# Altium PCB LED_Matrix.PcbDoc (part 2 of 2)
Units mm, origin at the board's own origin, x right, y up, seen from the top; angles counter-clockwise.
Board outline 50 x 80 mm, 2 copper layers (Top Layer, Bottom Layer); 384 components, 49 nets, 1536 pads, 0 vias.
Unrouted connection lines stored in the file: 1487.
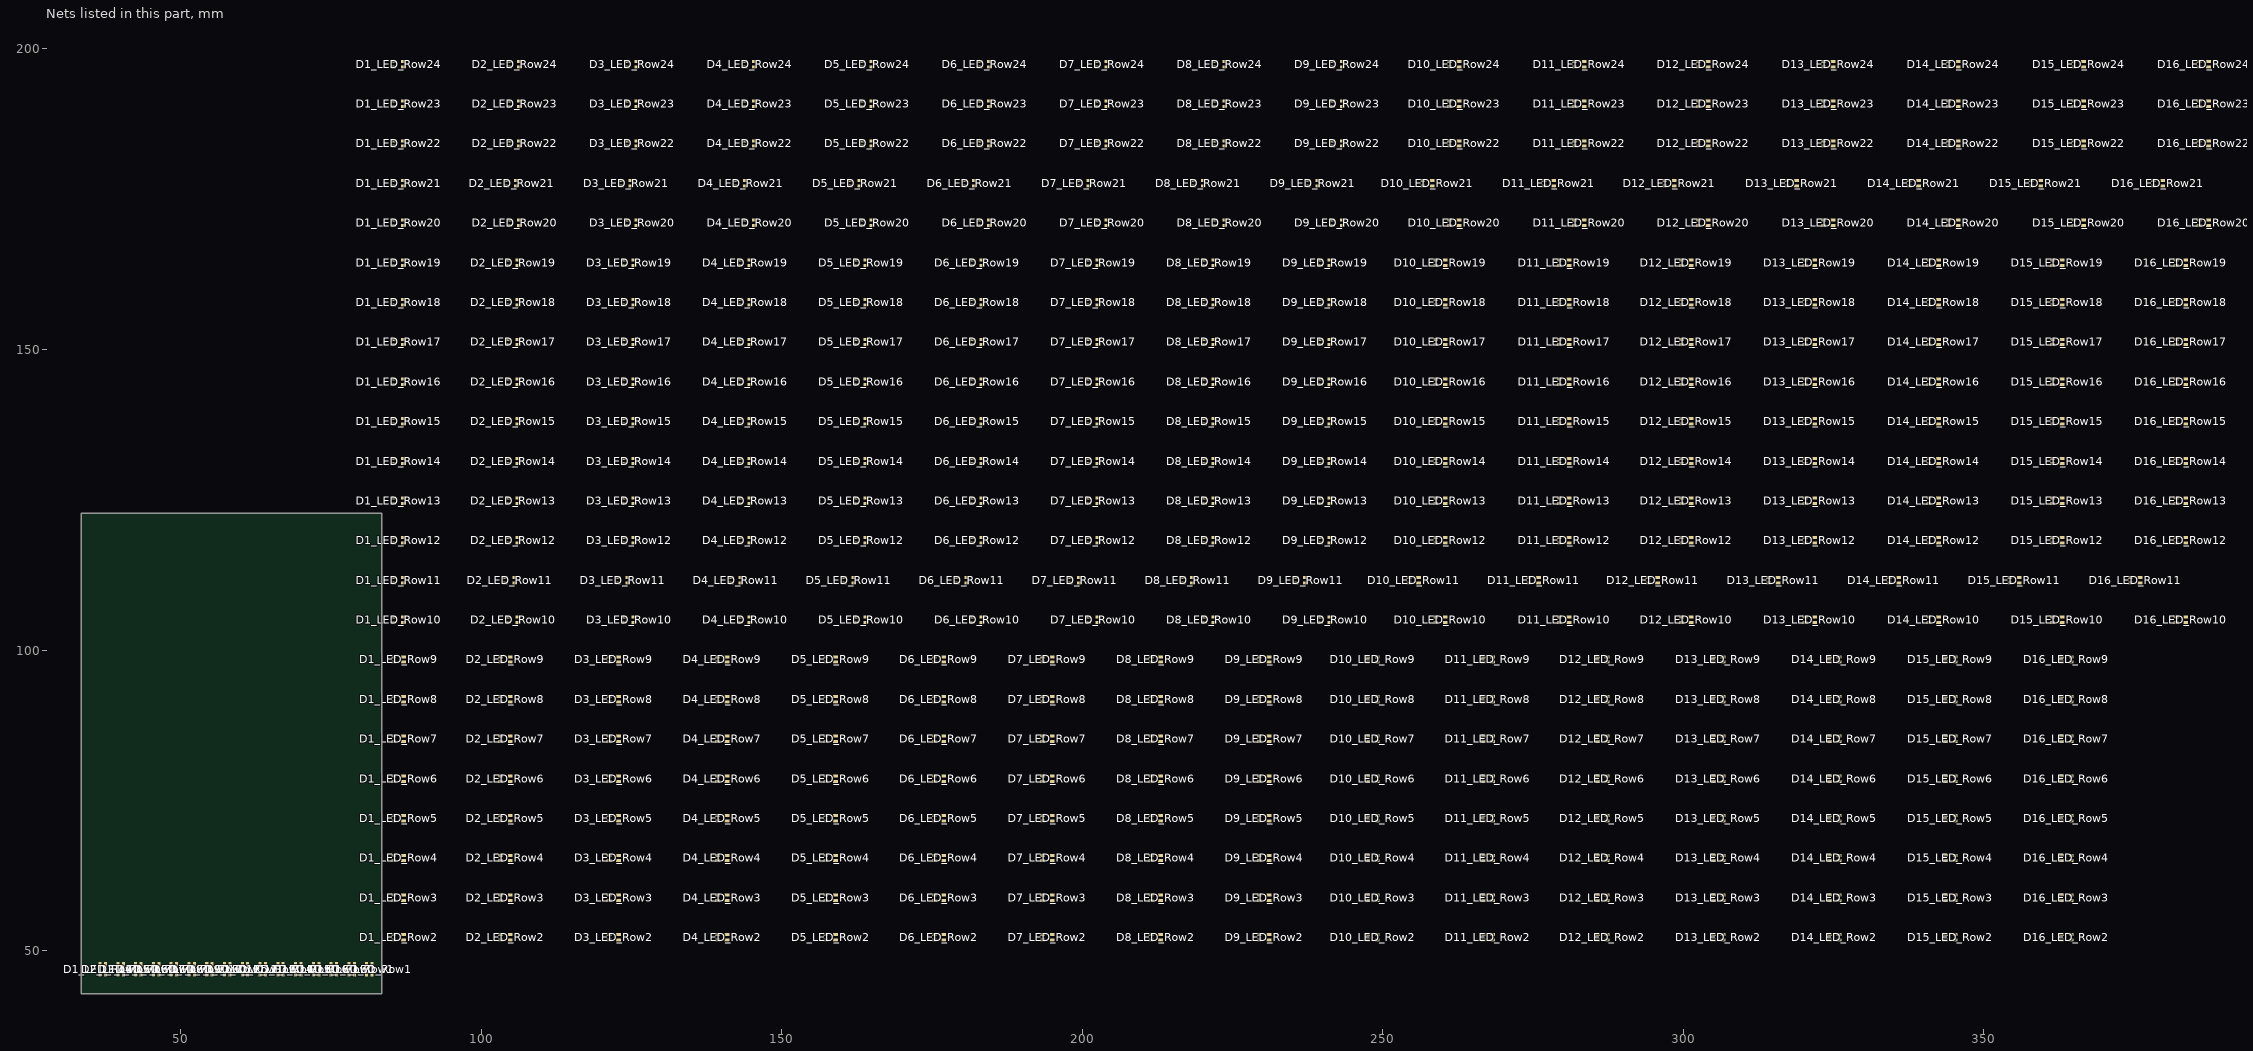
[diagram p2: the nets of this part, all layers, seen from the top]

## Part data
D1_LED_Row1 D1_LED_Row2 D1_LED_Row3 D1_LED_Row4 D1_LED_Row5 D1_LED_Row6 D1_LED_Row7 D1_LED_Row8 D1_LED_Row9 D1_LED_Row10 D1_LED_Row11 D1_LED_Row12 D1_LED_Row13 D1_LED_Row14 D1_LED_Row15 D1_LED_Row16 D1_LED_Row17 D1_LED_Row18 D1_LED_Row19 D1_LED_Row20 D1_LED_Row21 D1_LED_Row22 D1_LED_Row23 D1_LED_Row24 D2_LED_Row1 D2_LED_Row2 D2_LED_Row3 D2_LED_Row4 D2_LED_Row5 D2_LED_Row6 D2_LED_Row7 D2_LED_Row8 D2_LED_Row9 D2_LED_Row10 D2_LED_Row11 D2_LED_Row12 D2_LED_Row13 D2_LED_Row14 D2_LED_Row15 D2_LED_Row16 D2_LED_Row17 D2_LED_Row18 D2_LED_Row19 D2_LED_Row20 D2_LED_Row21 D2_LED_Row22 D2_LED_Row23 D2_LED_Row24 D3_LED_Row1 D3_LED_Row2 D3_LED_Row3 D3_LED_Row4 D3_LED_Row5 D3_LED_Row6 D3_LED_Row7 D3_LED_Row8 D3_LED_Row9 D3_LED_Row10 D3_LED_Row11 D3_LED_Row12 D3_LED_Row13 D3_LED_Row14 D3_LED_Row15 D3_LED_Row16 D3_LED_Row17 D3_LED_Row18 D3_LED_Row19 D3_LED_Row20 D3_LED_Row21 D3_LED_Row22 D3_LED_Row23 D3_LED_Row24 D4_LED_Row1 D4_LED_Row2 D4_LED_Row3 D4_LED_Row4 D4_LED_Row5 D4_LED_Row6 D4_LED_Row7 D4_LED_Row8 D4_LED_Row9 D4_LED_Row10 D4_LED_Row11 D4_LED_Row12 D4_LED_Row13 D4_LED_Row14 D4_LED_Row15 D4_LED_Row16 D4_LED_Row17 D4_LED_Row18 D4_LED_Row19 D4_LED_Row20 D4_LED_Row21 D4_LED_Row22 D4_LED_Row23 D4_LED_Row24 D5_LED_Row1 D5_LED_Row2 D5_LED_Row3 D5_LED_Row4 D5_LED_Row5 D5_LED_Row6 D5_LED_Row7 D5_LED_Row8 D5_LED_Row9 D5_LED_Row10 D5_LED_Row11 D5_LED_Row12 D5_LED_Row13 D5_LED_Row14 D5_LED_Row15 D5_LED_Row16 D5_LED_Row17 D5_LED_Row18 D5_LED_Row19 D5_LED_Row20 D5_LED_Row21 D5_LED_Row22 D5_LED_Row23 D5_LED_Row24 D6_LED_Row1 D6_LED_Row2 D6_LED_Row3 D6_LED_Row4 D6_LED_Row5 D6_LED_Row6 D6_LED_Row7 D6_LED_Row8 D6_LED_Row9 D6_LED_Row10 D6_LED_Row11 D6_LED_Row12 D6_LED_Row13 D6_LED_Row14 D6_LED_Row15 D6_LED_Row16 D6_LED_Row17 D6_LED_Row18 D6_LED_Row19 D6_LED_Row20 D6_LED_Row21 D6_LED_Row22 D6_LED_Row23 D6_LED_Row24 D7_LED_Row1 D7_LED_Row2 D7_LED_Row3 D7_LED_Row4 D7_LED_Row5 D7_LED_Row6 D7_LED_Row7 D7_LED_Row8 D7_LED_Row9 D7_LED_Row10 D7_LED_Row11 D7_LED_Row12 D7_LED_Row13 D7_LED_Row14 D7_LED_Row15 D7_LED_Row16 D7_LED_Row17 D7_LED_Row18 D7_LED_Row19 D7_LED_Row20 D7_LED_Row21 D7_LED_Row22 D7_LED_Row23 D7_LED_Row24 D8_LED_Row1 D8_LED_Row2 D8_LED_Row3 D8_LED_Row4 D8_LED_Row5 D8_LED_Row6 D8_LED_Row7 D8_LED_Row8 D8_LED_Row9 D8_LED_Row10 D8_LED_Row11 D8_LED_Row12 D8_LED_Row13 D8_LED_Row14 D8_LED_Row15 D8_LED_Row16 D8_LED_Row17 D8_LED_Row18 D8_LED_Row19 D8_LED_Row20 D8_LED_Row21 D8_LED_Row22 D8_LED_Row23 D8_LED_Row24 D9_LED_Row1 D9_LED_Row2 D9_LED_Row3 D9_LED_Row4 D9_LED_Row5 D9_LED_Row6 D9_LED_Row7 D9_LED_Row8 D9_LED_Row9 D9_LED_Row10 D9_LED_Row11 D9_LED_Row12 D9_LED_Row13 D9_LED_Row14 D9_LED_Row15 D9_LED_Row16 D9_LED_Row17 D9_LED_Row18 D9_LED_Row19 D9_LED_Row20 D9_LED_Row21 D9_LED_Row22 D9_LED_Row23 D9_LED_Row24 D10_LED_Row1 D10_LED_Row2 D10_LED_Row3 D10_LED_Row4 D10_LED_Row5 D10_LED_Row6 D10_LED_Row7 D10_LED_Row8 D10_LED_Row9 D10_LED_Row10 D10_LED_Row11 D10_LED_Row12 D10_LED_Row13 D10_LED_Row14 D10_LED_Row15 D10_LED_Row16 D10_LED_Row17 D10_LED_Row18 D10_LED_Row19 D10_LED_Row20 D10_LED_Row21 D10_LED_Row22 D10_LED_Row23 D10_LED_Row24 D11_LED_Row1 D11_LED_Row2 D11_LED_Row3 D11_LED_Row4 D11_LED_Row5 D11_LED_Row6 D11_LED_Row7 D11_LED_Row8 D11_LED_Row9 D11_LED_Row10 D11_LED_Row11 D11_LED_Row12 D11_LED_Row13 D11_LED_Row14 D11_LED_Row15 D11_LED_Row16 D11_LED_Row17 D11_LED_Row18 D11_LED_Row19 D11_LED_Row20 D11_LED_Row21 D11_LED_Row22 D11_LED_Row23 D11_LED_Row24 D12_LED_Row1 D12_LED_Row2 D12_LED_Row3 D12_LED_Row4 D12_LED_Row5 D12_LED_Row6 D12_LED_Row7 D12_LED_Row8 D12_LED_Row9 D12_LED_Row10 D12_LED_Row11 D12_LED_Row12 D12_LED_Row13 D12_LED_Row14 D12_LED_Row15 D12_LED_Row16 D12_LED_Row17 D12_LED_Row18 D12_LED_Row19 D12_LED_Row20 D12_LED_Row21 D12_LED_Row22 D12_LED_Row23 D12_LED_Row24 D13_LED_Row1 D13_LED_Row2 D13_LED_Row3 D13_LED_Row4 D13_LED_Row5 D13_LED_Row6 D13_LED_Row7 D13_LED_Row8 D13_LED_Row9 D13_LED_Row10 D13_LED_Row11 D13_LED_Row12 D13_LED_Row13 D13_LED_Row14 D13_LED_Row15 D13_LED_Row16 D13_LED_Row17 D13_LED_Row18 D13_LED_Row19 D13_LED_Row20 D13_LED_Row21 D13_LED_Row22 D13_LED_Row23 D13_LED_Row24 D14_LED_Row1 D14_LED_Row2 D14_LED_Row3 D14_LED_Row4 D14_LED_Row5 D14_LED_Row6 D14_LED_Row7 D14_LED_Row8 D14_LED_Row9 D14_LED_Row10 D14_LED_Row11 D14_LED_Row12 D14_LED_Row13 D14_LED_Row14 D14_LED_Row15 D14_LED_Row16 D14_LED_Row17 D14_LED_Row18 D14_LED_Row19 D14_LED_Row20 D14_LED_Row21 D14_LED_Row22 D14_LED_Row23 D14_LED_Row24 D15_LED_Row1 D15_LED_Row2 D15_LED_Row3 D15_LED_Row4 D15_LED_Row5 D15_LED_Row6 D15_LED_Row7 D15_LED_Row8 D15_LED_Row9 D15_LED_Row10 D15_LED_Row11 D15_LED_Row12 D15_LED_Row13 D15_LED_Row14 D15_LED_Row15 D15_LED_Row16 D15_LED_Row17 D15_LED_Row18 D15_LED_Row19 D15_LED_Row20 D15_LED_Row21 D15_LED_Row22 D15_LED_Row23 D15_LED_Row24 D16_LED_Row1 D16_LED_Row2 D16_LED_Row3 D16_LED_Row4 D16_LED_Row5 D16_LED_Row6 D16_LED_Row7 D16_LED_Row8 D16_LED_Row9 D16_LED_Row10 D16_LED_Row11 D16_LED_Row12 D16_LED_Row13 D16_LED_Row14 D16_LED_Row15 D16_LED_Row16 D16_LED_Row17 D16_LED_Row18 D16_LED_Row19 D16_LED_Row20 D16_LED_Row21 D16_LED_Row22 D16_LED_Row23 D16_LED_Row24: "Red, Green, Blue (RGB) - LED Indication - Discrete 2V Red, 3V Green, 3V Blue 0606 (1616 Metric) / 10mA per LED channel", Package=None, Availability="In Stock", Check_prices=https://www.snapeda.com/parts/B38G3RGB-10D0003H2U1930/Harvatek/view-part/?ref=eda, ComponentLink1Description=Datasheet, ComponentLink1URL=https://mm.digikey.com/Volume0/opasdata/d220001/medias/docus/2486/B38G3RGB-10D0003H2U1930%20%20V1.9.pdf, MF="Harvatek Corporation", MP=B38G3RGB-10D0003H2U1930, Price=None, Purchase-URL=https://pricing.snapeda.com/search/part/B38G3RGB-10D0003H2U1930/?ref=eda, SnapEDA_Link=https://www.snapeda.com/parts/B38G3RGB-10D0003H2U1930/Harvatek/view-part/?ref=snap

## Nets (pads, with @x,y where several pads share a name; then routed paths per layer and width w, separated by ;. In a path a pad name is that pad's centre, name@x,y a point inside that pad or via, vN(x,y) a via of type N, cw(c..) or ccw(c..) an arc to the next point about the centre after c; other vN are vias at no path point)
4V_LED_Row1: D1_LED_Row1.3 D1_LED_Row2.3 D1_LED_Row3.3 D1_LED_Row4.3 D1_LED_Row5.3 D1_LED_Row6.3 D1_LED_Row7.3 D1_LED_Row8.3 D1_LED_Row9.3 D1_LED_Row10.3 D1_LED_Row11.3 D1_LED_Row12.3 D1_LED_Row13.3 D1_LED_Row14.3 D1_LED_Row15.3 D1_LED_Row16.3 D1_LED_Row17.3 D1_LED_Row18.3 D1_LED_Row19.3 D1_LED_Row20.3 D1_LED_Row21.3 D1_LED_Row22.3 D1_LED_Row23.3 D1_LED_Row24.3 D2_LED_Row1.3 D2_LED_Row2.3 D2_LED_Row3.3 D2_LED_Row4.3 D2_LED_Row5.3 D2_LED_Row6.3 D2_LED_Row7.3 D2_LED_Row8.3 D2_LED_Row9.3 D2_LED_Row10.3 D2_LED_Row11.3 D2_LED_Row12.3 D2_LED_Row13.3 D2_LED_Row14.3 D2_LED_Row15.3 D2_LED_Row16.3 D2_LED_Row17.3 D2_LED_Row18.3 D2_LED_Row19.3 D2_LED_Row20.3 D2_LED_Row21.3 D2_LED_Row22.3 D2_LED_Row23.3 D2_LED_Row24.3 D3_LED_Row1.3 D3_LED_Row2.3 D3_LED_Row3.3 D3_LED_Row4.3 D3_LED_Row5.3 D3_LED_Row6.3 D3_LED_Row7.3 D3_LED_Row8.3 D3_LED_Row9.3 D3_LED_Row10.3 D3_LED_Row11.3 D3_LED_Row12.3 D3_LED_Row13.3 D3_LED_Row14.3 D3_LED_Row15.3 D3_LED_Row16.3 D3_LED_Row17.3 D3_LED_Row18.3 D3_LED_Row19.3 D3_LED_Row20.3 D3_LED_Row21.3 D3_LED_Row22.3 D3_LED_Row23.3 D3_LED_Row24.3 D4_LED_Row1.3 D4_LED_Row2.3 D4_LED_Row3.3 D4_LED_Row4.3 D4_LED_Row5.3 D4_LED_Row6.3 D4_LED_Row7.3 D4_LED_Row8.3 D4_LED_Row9.3 D4_LED_Row10.3 D4_LED_Row11.3 D4_LED_Row12.3 D4_LED_Row13.3 D4_LED_Row14.3 D4_LED_Row15.3 D4_LED_Row16.3 D4_LED_Row17.3 D4_LED_Row18.3 D4_LED_Row19.3 D4_LED_Row20.3 D4_LED_Row21.3 D4_LED_Row22.3 D4_LED_Row23.3 D4_LED_Row24.3 D5_LED_Row1.3 D5_LED_Row2.3 D5_LED_Row3.3 D5_LED_Row4.3 D5_LED_Row5.3 D5_LED_Row6.3 D5_LED_Row7.3 D5_LED_Row8.3 D5_LED_Row9.3 D5_LED_Row10.3 D5_LED_Row11.3 D5_LED_Row12.3 D5_LED_Row13.3 D5_LED_Row14.3 D5_LED_Row15.3 D5_LED_Row16.3 D5_LED_Row17.3 D5_LED_Row18.3 D5_LED_Row19.3 D5_LED_Row20.3 D5_LED_Row21.3 D5_LED_Row22.3 D5_LED_Row23.3 D5_LED_Row24.3 D6_LED_Row1.3 D6_LED_Row2.3 D6_LED_Row3.3 D6_LED_Row4.3 D6_LED_Row5.3 D6_LED_Row6.3 D6_LED_Row7.3 D6_LED_Row8.3 D6_LED_Row9.3 D6_LED_Row10.3 D6_LED_Row11.3 D6_LED_Row12.3 D6_LED_Row13.3 D6_LED_Row14.3 D6_LED_Row15.3 D6_LED_Row16.3 D6_LED_Row17.3 D6_LED_Row18.3 D6_LED_Row19.3 D6_LED_Row20.3 D6_LED_Row21.3 D6_LED_Row22.3 D6_LED_Row23.3 D6_LED_Row24.3 D7_LED_Row1.3 D7_LED_Row2.3 D7_LED_Row3.3 D7_LED_Row4.3 D7_LED_Row5.3 D7_LED_Row6.3 D7_LED_Row7.3 D7_LED_Row8.3 D7_LED_Row9.3 D7_LED_Row10.3 D7_LED_Row11.3 D7_LED_Row12.3 D7_LED_Row13.3 D7_LED_Row14.3 D7_LED_Row15.3 D7_LED_Row16.3 D7_LED_Row17.3 D7_LED_Row18.3 D7_LED_Row19.3 D7_LED_Row20.3 D7_LED_Row21.3 D7_LED_Row22.3 D7_LED_Row23.3 D7_LED_Row24.3 D8_LED_Row1.3 D8_LED_Row2.3 D8_LED_Row3.3 D8_LED_Row4.3 D8_LED_Row5.3 D8_LED_Row6.3 D8_LED_Row7.3 D8_LED_Row8.3 D8_LED_Row9.3 D8_LED_Row10.3 D8_LED_Row11.3 D8_LED_Row12.3 D8_LED_Row13.3 D8_LED_Row14.3 D8_LED_Row15.3 D8_LED_Row16.3 D8_LED_Row17.3 D8_LED_Row18.3 D8_LED_Row19.3 D8_LED_Row20.3 D8_LED_Row21.3 D8_LED_Row22.3 D8_LED_Row23.3 D8_LED_Row24.3 D9_LED_Row1.3 D9_LED_Row2.3 D9_LED_Row3.3 D9_LED_Row4.3 D9_LED_Row5.3 D9_LED_Row6.3 D9_LED_Row7.3 D9_LED_Row8.3 D9_LED_Row9.3 D9_LED_Row10.3 D9_LED_Row11.3 D9_LED_Row12.3 D9_LED_Row13.3 D9_LED_Row14.3 D9_LED_Row15.3 D9_LED_Row16.3 D9_LED_Row17.3 D9_LED_Row18.3 D9_LED_Row19.3 D9_LED_Row20.3 D9_LED_Row21.3 D9_LED_Row22.3 D9_LED_Row23.3 D9_LED_Row24.3 D10_LED_Row1.3 D10_LED_Row2.3 D10_LED_Row3.3 D10_LED_Row4.3 D10_LED_Row5.3 D10_LED_Row6.3 D10_LED_Row7.3 D10_LED_Row8.3 D10_LED_Row9.3 D10_LED_Row10.3 D10_LED_Row11.3 D10_LED_Row12.3 D10_LED_Row13.3 D10_LED_Row14.3 D10_LED_Row15.3 D10_LED_Row16.3 D10_LED_Row17.3 D10_LED_Row18.3 D10_LED_Row19.3 D10_LED_Row20.3 D10_LED_Row21.3 D10_LED_Row22.3 D10_LED_Row23.3 D10_LED_Row24.3 D11_LED_Row1.3 D11_LED_Row2.3 D11_LED_Row3.3 D11_LED_Row4.3 D11_LED_Row5.3 D11_LED_Row6.3 D11_LED_Row7.3 D11_LED_Row8.3 D11_LED_Row9.3 D11_LED_Row10.3 D11_LED_Row11.3 D11_LED_Row12.3 D11_LED_Row13.3 D11_LED_Row14.3 D11_LED_Row15.3 D11_LED_Row16.3 D11_LED_Row17.3 D11_LED_Row18.3 D11_LED_Row19.3 D11_LED_Row20.3 D11_LED_Row21.3 D11_LED_Row22.3 D11_LED_Row23.3 D11_LED_Row24.3 D12_LED_Row1.3 D12_LED_Row2.3 D12_LED_Row3.3 D12_LED_Row4.3 D12_LED_Row5.3 D12_LED_Row6.3 D12_LED_Row7.3 D12_LED_Row8.3 D12_LED_Row9.3 D12_LED_Row10.3 D12_LED_Row11.3 D12_LED_Row12.3 D12_LED_Row13.3 D12_LED_Row14.3 D12_LED_Row15.3 D12_LED_Row16.3 D12_LED_Row17.3 D12_LED_Row18.3 D12_LED_Row19.3 D12_LED_Row20.3 D12_LED_Row21.3 D12_LED_Row22.3 D12_LED_Row23.3 D12_LED_Row24.3 D13_LED_Row1.3 D13_LED_Row2.3 D13_LED_Row3.3 D13_LED_Row4.3 D13_LED_Row5.3 D13_LED_Row6.3 D13_LED_Row7.3 D13_LED_Row8.3 D13_LED_Row9.3 D13_LED_Row10.3 D13_LED_Row11.3 D13_LED_Row12.3 D13_LED_Row13.3 D13_LED_Row14.3 D13_LED_Row15.3 D13_LED_Row16.3 D13_LED_Row17.3 D13_LED_Row18.3 D13_LED_Row19.3 D13_LED_Row20.3 D13_LED_Row21.3 D13_LED_Row22.3 D13_LED_Row23.3 D13_LED_Row24.3 D14_LED_Row1.3 D14_LED_Row2.3 D14_LED_Row3.3 D14_LED_Row4.3 D14_LED_Row5.3 D14_LED_Row6.3 D14_LED_Row7.3 D14_LED_Row8.3 D14_LED_Row9.3 D14_LED_Row10.3 D14_LED_Row11.3 D14_LED_Row12.3 D14_LED_Row13.3 D14_LED_Row14.3 D14_LED_Row15.3 D14_LED_Row16.3 D14_LED_Row17.3 D14_LED_Row18.3 D14_LED_Row19.3 D14_LED_Row20.3 D14_LED_Row21.3 D14_LED_Row22.3 D14_LED_Row23.3 D14_LED_Row24.3 D15_LED_Row1.3 D15_LED_Row2.3 D15_LED_Row3.3 D15_LED_Row4.3 D15_LED_Row5.3 D15_LED_Row6.3 D15_LED_Row7.3 D15_LED_Row8.3 D15_LED_Row9.3 D15_LED_Row10.3 D15_LED_Row11.3 D15_LED_Row12.3 D15_LED_Row13.3 D15_LED_Row14.3 D15_LED_Row15.3 D15_LED_Row16.3 D15_LED_Row17.3 D15_LED_Row18.3 D15_LED_Row19.3 D15_LED_Row20.3 D15_LED_Row21.3 D15_LED_Row22.3 D15_LED_Row23.3 D15_LED_Row24.3 D16_LED_Row1.3 D16_LED_Row2.3 D16_LED_Row3.3 D16_LED_Row4.3 D16_LED_Row5.3 D16_LED_Row6.3 D16_LED_Row7.3 D16_LED_Row8.3 D16_LED_Row9.3 D16_LED_Row10.3 D16_LED_Row11.3 D16_LED_Row12.3 D16_LED_Row13.3 D16_LED_Row14.3 D16_LED_Row15.3 D16_LED_Row16.3 D16_LED_Row17.3 D16_LED_Row18.3 D16_LED_Row19.3 D16_LED_Row20.3 D16_LED_Row21.3 D16_LED_Row22.3 D16_LED_Row23.3 D16_LED_Row24.3
Col_1_LED_Row1: D1_LED_Row1.2 D1_LED_Row2.2 D1_LED_Row3.2 D1_LED_Row4.2 D1_LED_Row5.2 D1_LED_Row6.2 D1_LED_Row7.2 D1_LED_Row8.2 D1_LED_Row9.2 D1_LED_Row10.2 D1_LED_Row11.2 D1_LED_Row12.2 D1_LED_Row13.2 D1_LED_Row14.2 D1_LED_Row15.2 D1_LED_Row16.2 D1_LED_Row17.2 D1_LED_Row18.2 D1_LED_Row19.2 D1_LED_Row20.2 D1_LED_Row21.2 D1_LED_Row22.2 D1_LED_Row23.2 D1_LED_Row24.2
Col_2_LED_Row1: D1_LED_Row1.1 D1_LED_Row2.1 D1_LED_Row3.1 D1_LED_Row4.1 D1_LED_Row5.1 D1_LED_Row6.1 D1_LED_Row7.1 D1_LED_Row8.1 D1_LED_Row9.1 D1_LED_Row10.1 D1_LED_Row11.1 D1_LED_Row12.1 D1_LED_Row13.1 D1_LED_Row14.1 D1_LED_Row15.1 D1_LED_Row16.1 D1_LED_Row17.1 D1_LED_Row18.1 D1_LED_Row19.1 D1_LED_Row20.1 D1_LED_Row21.1 D1_LED_Row22.1 D1_LED_Row23.1 D1_LED_Row24.1
Col_3_LED_Row1: D1_LED_Row1.4 D1_LED_Row2.4 D1_LED_Row3.4 D1_LED_Row4.4 D1_LED_Row5.4 D1_LED_Row6.4 D1_LED_Row7.4 D1_LED_Row8.4 D1_LED_Row9.4 D1_LED_Row10.4 D1_LED_Row11.4 D1_LED_Row12.4 D1_LED_Row13.4 D1_LED_Row14.4 D1_LED_Row15.4 D1_LED_Row16.4 D1_LED_Row17.4 D1_LED_Row18.4 D1_LED_Row19.4 D1_LED_Row20.4 D1_LED_Row21.4 D1_LED_Row22.4 D1_LED_Row23.4 D1_LED_Row24.4
Col_4_LED_Row1: D2_LED_Row1.2 D2_LED_Row2.2 D2_LED_Row3.2 D2_LED_Row4.2 D2_LED_Row5.2 D2_LED_Row6.2 D2_LED_Row7.2 D2_LED_Row8.2 D2_LED_Row9.2 D2_LED_Row10.2 D2_LED_Row11.2 D2_LED_Row12.2 D2_LED_Row13.2 D2_LED_Row14.2 D2_LED_Row15.2 D2_LED_Row16.2 D2_LED_Row17.2 D2_LED_Row18.2 D2_LED_Row19.2 D2_LED_Row20.2 D2_LED_Row21.2 D2_LED_Row22.2 D2_LED_Row23.2 D2_LED_Row24.2
Col_5_LED_Row1: D2_LED_Row1.1 D2_LED_Row2.1 D2_LED_Row3.1 D2_LED_Row4.1 D2_LED_Row5.1 D2_LED_Row6.1 D2_LED_Row7.1 D2_LED_Row8.1 D2_LED_Row9.1 D2_LED_Row10.1 D2_LED_Row11.1 D2_LED_Row12.1 D2_LED_Row13.1 D2_LED_Row14.1 D2_LED_Row15.1 D2_LED_Row16.1 D2_LED_Row17.1 D2_LED_Row18.1 D2_LED_Row19.1 D2_LED_Row20.1 D2_LED_Row21.1 D2_LED_Row22.1 D2_LED_Row23.1 D2_LED_Row24.1
Col_6_LED_Row1: D2_LED_Row1.4 D2_LED_Row2.4 D2_LED_Row3.4 D2_LED_Row4.4 D2_LED_Row5.4 D2_LED_Row6.4 D2_LED_Row7.4 D2_LED_Row8.4 D2_LED_Row9.4 D2_LED_Row10.4 D2_LED_Row11.4 D2_LED_Row12.4 D2_LED_Row13.4 D2_LED_Row14.4 D2_LED_Row15.4 D2_LED_Row16.4 D2_LED_Row17.4 D2_LED_Row18.4 D2_LED_Row19.4 D2_LED_Row20.4 D2_LED_Row21.4 D2_LED_Row22.4 D2_LED_Row23.4 D2_LED_Row24.4
Col_7_LED_Row1: D3_LED_Row1.2 D3_LED_Row2.2 D3_LED_Row3.2 D3_LED_Row4.2 D3_LED_Row5.2 D3_LED_Row6.2 D3_LED_Row7.2 D3_LED_Row8.2 D3_LED_Row9.2 D3_LED_Row10.2 D3_LED_Row11.2 D3_LED_Row12.2 D3_LED_Row13.2 D3_LED_Row14.2 D3_LED_Row15.2 D3_LED_Row16.2 D3_LED_Row17.2 D3_LED_Row18.2 D3_LED_Row19.2 D3_LED_Row20.2 D3_LED_Row21.2 D3_LED_Row22.2 D3_LED_Row23.2 D3_LED_Row24.2
Col_8_LED_Row1: D3_LED_Row1.1 D3_LED_Row2.1 D3_LED_Row3.1 D3_LED_Row4.1 D3_LED_Row5.1 D3_LED_Row6.1 D3_LED_Row7.1 D3_LED_Row8.1 D3_LED_Row9.1 D3_LED_Row10.1 D3_LED_Row11.1 D3_LED_Row12.1 D3_LED_Row13.1 D3_LED_Row14.1 D3_LED_Row15.1 D3_LED_Row16.1 D3_LED_Row17.1 D3_LED_Row18.1 D3_LED_Row19.1 D3_LED_Row20.1 D3_LED_Row21.1 D3_LED_Row22.1 D3_LED_Row23.1 D3_LED_Row24.1
Col_9_LED_Row1: D3_LED_Row1.4 D3_LED_Row2.4 D3_LED_Row3.4 D3_LED_Row4.4 D3_LED_Row5.4 D3_LED_Row6.4 D3_LED_Row7.4 D3_LED_Row8.4 D3_LED_Row9.4 D3_LED_Row10.4 D3_LED_Row11.4 D3_LED_Row12.4 D3_LED_Row13.4 D3_LED_Row14.4 D3_LED_Row15.4 D3_LED_Row16.4 D3_LED_Row17.4 D3_LED_Row18.4 D3_LED_Row19.4 D3_LED_Row20.4 D3_LED_Row21.4 D3_LED_Row22.4 D3_LED_Row23.4 D3_LED_Row24.4
Col_10_LED_Row1: D4_LED_Row1.2 D4_LED_Row2.2 D4_LED_Row3.2 D4_LED_Row4.2 D4_LED_Row5.2 D4_LED_Row6.2 D4_LED_Row7.2 D4_LED_Row8.2 D4_LED_Row9.2 D4_LED_Row10.2 D4_LED_Row11.2 D4_LED_Row12.2 D4_LED_Row13.2 D4_LED_Row14.2 D4_LED_Row15.2 D4_LED_Row16.2 D4_LED_Row17.2 D4_LED_Row18.2 D4_LED_Row19.2 D4_LED_Row20.2 D4_LED_Row21.2 D4_LED_Row22.2 D4_LED_Row23.2 D4_LED_Row24.2
Col_11_LED_Row1: D4_LED_Row1.1 D4_LED_Row2.1 D4_LED_Row3.1 D4_LED_Row4.1 D4_LED_Row5.1 D4_LED_Row6.1 D4_LED_Row7.1 D4_LED_Row8.1 D4_LED_Row9.1 D4_LED_Row10.1 D4_LED_Row11.1 D4_LED_Row12.1 D4_LED_Row13.1 D4_LED_Row14.1 D4_LED_Row15.1 D4_LED_Row16.1 D4_LED_Row17.1 D4_LED_Row18.1 D4_LED_Row19.1 D4_LED_Row20.1 D4_LED_Row21.1 D4_LED_Row22.1 D4_LED_Row23.1 D4_LED_Row24.1
Col_12_LED_Row1: D4_LED_Row1.4 D4_LED_Row2.4 D4_LED_Row3.4 D4_LED_Row4.4 D4_LED_Row5.4 D4_LED_Row6.4 D4_LED_Row7.4 D4_LED_Row8.4 D4_LED_Row9.4 D4_LED_Row10.4 D4_LED_Row11.4 D4_LED_Row12.4 D4_LED_Row13.4 D4_LED_Row14.4 D4_LED_Row15.4 D4_LED_Row16.4 D4_LED_Row17.4 D4_LED_Row18.4 D4_LED_Row19.4 D4_LED_Row20.4 D4_LED_Row21.4 D4_LED_Row22.4 D4_LED_Row23.4 D4_LED_Row24.4
Col_13_LED_Row1: D5_LED_Row1.2 D5_LED_Row2.2 D5_LED_Row3.2 D5_LED_Row4.2 D5_LED_Row5.2 D5_LED_Row6.2 D5_LED_Row7.2 D5_LED_Row8.2 D5_LED_Row9.2 D5_LED_Row10.2 D5_LED_Row11.2 D5_LED_Row12.2 D5_LED_Row13.2 D5_LED_Row14.2 D5_LED_Row15.2 D5_LED_Row16.2 D5_LED_Row17.2 D5_LED_Row18.2 D5_LED_Row19.2 D5_LED_Row20.2 D5_LED_Row21.2 D5_LED_Row22.2 D5_LED_Row23.2 D5_LED_Row24.2
Col_14_LED_Row1: D5_LED_Row1.1 D5_LED_Row2.1 D5_LED_Row3.1 D5_LED_Row4.1 D5_LED_Row5.1 D5_LED_Row6.1 D5_LED_Row7.1 D5_LED_Row8.1 D5_LED_Row9.1 D5_LED_Row10.1 D5_LED_Row11.1 D5_LED_Row12.1 D5_LED_Row13.1 D5_LED_Row14.1 D5_LED_Row15.1 D5_LED_Row16.1 D5_LED_Row17.1 D5_LED_Row18.1 D5_LED_Row19.1 D5_LED_Row20.1 D5_LED_Row21.1 D5_LED_Row22.1 D5_LED_Row23.1 D5_LED_Row24.1
Col_15_LED_Row1: D5_LED_Row1.4 D5_LED_Row2.4 D5_LED_Row3.4 D5_LED_Row4.4 D5_LED_Row5.4 D5_LED_Row6.4 D5_LED_Row7.4 D5_LED_Row8.4 D5_LED_Row9.4 D5_LED_Row10.4 D5_LED_Row11.4 D5_LED_Row12.4 D5_LED_Row13.4 D5_LED_Row14.4 D5_LED_Row15.4 D5_LED_Row16.4 D5_LED_Row17.4 D5_LED_Row18.4 D5_LED_Row19.4 D5_LED_Row20.4 D5_LED_Row21.4 D5_LED_Row22.4 D5_LED_Row23.4 D5_LED_Row24.4
Col_16_LED_Row1: D6_LED_Row1.2 D6_LED_Row2.2 D6_LED_Row3.2 D6_LED_Row4.2 D6_LED_Row5.2 D6_LED_Row6.2 D6_LED_Row7.2 D6_LED_Row8.2 D6_LED_Row9.2 D6_LED_Row10.2 D6_LED_Row11.2 D6_LED_Row12.2 D6_LED_Row13.2 D6_LED_Row14.2 D6_LED_Row15.2 D6_LED_Row16.2 D6_LED_Row17.2 D6_LED_Row18.2 D6_LED_Row19.2 D6_LED_Row20.2 D6_LED_Row21.2 D6_LED_Row22.2 D6_LED_Row23.2 D6_LED_Row24.2
Col_17_LED_Row1: D6_LED_Row1.1 D6_LED_Row2.1 D6_LED_Row3.1 D6_LED_Row4.1 D6_LED_Row5.1 D6_LED_Row6.1 D6_LED_Row7.1 D6_LED_Row8.1 D6_LED_Row9.1 D6_LED_Row10.1 D6_LED_Row11.1 D6_LED_Row12.1 D6_LED_Row13.1 D6_LED_Row14.1 D6_LED_Row15.1 D6_LED_Row16.1 D6_LED_Row17.1 D6_LED_Row18.1 D6_LED_Row19.1 D6_LED_Row20.1 D6_LED_Row21.1 D6_LED_Row22.1 D6_LED_Row23.1 D6_LED_Row24.1
Col_18_LED_Row1: D6_LED_Row1.4 D6_LED_Row2.4 D6_LED_Row3.4 D6_LED_Row4.4 D6_LED_Row5.4 D6_LED_Row6.4 D6_LED_Row7.4 D6_LED_Row8.4 D6_LED_Row9.4 D6_LED_Row10.4 D6_LED_Row11.4 D6_LED_Row12.4 D6_LED_Row13.4 D6_LED_Row14.4 D6_LED_Row15.4 D6_LED_Row16.4 D6_LED_Row17.4 D6_LED_Row18.4 D6_LED_Row19.4 D6_LED_Row20.4 D6_LED_Row21.4 D6_LED_Row22.4 D6_LED_Row23.4 D6_LED_Row24.4
Col_19_LED_Row1: D7_LED_Row1.2 D7_LED_Row2.2 D7_LED_Row3.2 D7_LED_Row4.2 D7_LED_Row5.2 D7_LED_Row6.2 D7_LED_Row7.2 D7_LED_Row8.2 D7_LED_Row9.2 D7_LED_Row10.2 D7_LED_Row11.2 D7_LED_Row12.2 D7_LED_Row13.2 D7_LED_Row14.2 D7_LED_Row15.2 D7_LED_Row16.2 D7_LED_Row17.2 D7_LED_Row18.2 D7_LED_Row19.2 D7_LED_Row20.2 D7_LED_Row21.2 D7_LED_Row22.2 D7_LED_Row23.2 D7_LED_Row24.2
Col_20_LED_Row1: D7_LED_Row1.1 D7_LED_Row2.1 D7_LED_Row3.1 D7_LED_Row4.1 D7_LED_Row5.1 D7_LED_Row6.1 D7_LED_Row7.1 D7_LED_Row8.1 D7_LED_Row9.1 D7_LED_Row10.1 D7_LED_Row11.1 D7_LED_Row12.1 D7_LED_Row13.1 D7_LED_Row14.1 D7_LED_Row15.1 D7_LED_Row16.1 D7_LED_Row17.1 D7_LED_Row18.1 D7_LED_Row19.1 D7_LED_Row20.1 D7_LED_Row21.1 D7_LED_Row22.1 D7_LED_Row23.1 D7_LED_Row24.1
Col_21_LED_Row1: D7_LED_Row1.4 D7_LED_Row2.4 D7_LED_Row3.4 D7_LED_Row4.4 D7_LED_Row5.4 D7_LED_Row6.4 D7_LED_Row7.4 D7_LED_Row8.4 D7_LED_Row9.4 D7_LED_Row10.4 D7_LED_Row11.4 D7_LED_Row12.4 D7_LED_Row13.4 D7_LED_Row14.4 D7_LED_Row15.4 D7_LED_Row16.4 D7_LED_Row17.4 D7_LED_Row18.4 D7_LED_Row19.4 D7_LED_Row20.4 D7_LED_Row21.4 D7_LED_Row22.4 D7_LED_Row23.4 D7_LED_Row24.4
Col_22_LED_Row1: D8_LED_Row1.2 D8_LED_Row2.2 D8_LED_Row3.2 D8_LED_Row4.2 D8_LED_Row5.2 D8_LED_Row6.2 D8_LED_Row7.2 D8_LED_Row8.2 D8_LED_Row9.2 D8_LED_Row10.2 D8_LED_Row11.2 D8_LED_Row12.2 D8_LED_Row13.2 D8_LED_Row14.2 D8_LED_Row15.2 D8_LED_Row16.2 D8_LED_Row17.2 D8_LED_Row18.2 D8_LED_Row19.2 D8_LED_Row20.2 D8_LED_Row21.2 D8_LED_Row22.2 D8_LED_Row23.2 D8_LED_Row24.2
Col_23_LED_Row1: D8_LED_Row1.1 D8_LED_Row2.1 D8_LED_Row3.1 D8_LED_Row4.1 D8_LED_Row5.1 D8_LED_Row6.1 D8_LED_Row7.1 D8_LED_Row8.1 D8_LED_Row9.1 D8_LED_Row10.1 D8_LED_Row11.1 D8_LED_Row12.1 D8_LED_Row13.1 D8_LED_Row14.1 D8_LED_Row15.1 D8_LED_Row16.1 D8_LED_Row17.1 D8_LED_Row18.1 D8_LED_Row19.1 D8_LED_Row20.1 D8_LED_Row21.1 D8_LED_Row22.1 D8_LED_Row23.1 D8_LED_Row24.1
Col_24_LED_Row1: D8_LED_Row1.4 D8_LED_Row2.4 D8_LED_Row3.4 D8_LED_Row4.4 D8_LED_Row5.4 D8_LED_Row6.4 D8_LED_Row7.4 D8_LED_Row8.4 D8_LED_Row9.4 D8_LED_Row10.4 D8_LED_Row11.4 D8_LED_Row12.4 D8_LED_Row13.4 D8_LED_Row14.4 D8_LED_Row15.4 D8_LED_Row16.4 D8_LED_Row17.4 D8_LED_Row18.4 D8_LED_Row19.4 D8_LED_Row20.4 D8_LED_Row21.4 D8_LED_Row22.4 D8_LED_Row23.4 D8_LED_Row24.4
Col_25_LED_Row1: D9_LED_Row1.2 D9_LED_Row2.2 D9_LED_Row3.2 D9_LED_Row4.2 D9_LED_Row5.2 D9_LED_Row6.2 D9_LED_Row7.2 D9_LED_Row8.2 D9_LED_Row9.2 D9_LED_Row10.2 D9_LED_Row11.2 D9_LED_Row12.2 D9_LED_Row13.2 D9_LED_Row14.2 D9_LED_Row15.2 D9_LED_Row16.2 D9_LED_Row17.2 D9_LED_Row18.2 D9_LED_Row19.2 D9_LED_Row20.2 D9_LED_Row21.2 D9_LED_Row22.2 D9_LED_Row23.2 D9_LED_Row24.2
Col_26_LED_Row1: D9_LED_Row1.1 D9_LED_Row2.1 D9_LED_Row3.1 D9_LED_Row4.1 D9_LED_Row5.1 D9_LED_Row6.1 D9_LED_Row7.1 D9_LED_Row8.1 D9_LED_Row9.1 D9_LED_Row10.1 D9_LED_Row11.1 D9_LED_Row12.1 D9_LED_Row13.1 D9_LED_Row14.1 D9_LED_Row15.1 D9_LED_Row16.1 D9_LED_Row17.1 D9_LED_Row18.1 D9_LED_Row19.1 D9_LED_Row20.1 D9_LED_Row21.1 D9_LED_Row22.1 D9_LED_Row23.1 D9_LED_Row24.1
Col_27_LED_Row1: D9_LED_Row1.4 D9_LED_Row2.4 D9_LED_Row3.4 D9_LED_Row4.4 D9_LED_Row5.4 D9_LED_Row6.4 D9_LED_Row7.4 D9_LED_Row8.4 D9_LED_Row9.4 D9_LED_Row10.4 D9_LED_Row11.4 D9_LED_Row12.4 D9_LED_Row13.4 D9_LED_Row14.4 D9_LED_Row15.4 D9_LED_Row16.4 D9_LED_Row17.4 D9_LED_Row18.4 D9_LED_Row19.4 D9_LED_Row20.4 D9_LED_Row21.4 D9_LED_Row22.4 D9_LED_Row23.4 D9_LED_Row24.4
Col_28_LED_Row1: D10_LED_Row1.2 D10_LED_Row2.2 D10_LED_Row3.2 D10_LED_Row4.2 D10_LED_Row5.2 D10_LED_Row6.2 D10_LED_Row7.2 D10_LED_Row8.2 D10_LED_Row9.2 D10_LED_Row10.2 D10_LED_Row11.2 D10_LED_Row12.2 D10_LED_Row13.2 D10_LED_Row14.2 D10_LED_Row15.2 D10_LED_Row16.2 D10_LED_Row17.2 D10_LED_Row18.2 D10_LED_Row19.2 D10_LED_Row20.2 D10_LED_Row21.2 D10_LED_Row22.2 D10_LED_Row23.2 D10_LED_Row24.2
Col_29_LED_Row1: D10_LED_Row1.1 D10_LED_Row2.1 D10_LED_Row3.1 D10_LED_Row4.1 D10_LED_Row5.1 D10_LED_Row6.1 D10_LED_Row7.1 D10_LED_Row8.1 D10_LED_Row9.1 D10_LED_Row10.1 D10_LED_Row11.1 D10_LED_Row12.1 D10_LED_Row13.1 D10_LED_Row14.1 D10_LED_Row15.1 D10_LED_Row16.1 D10_LED_Row17.1 D10_LED_Row18.1 D10_LED_Row19.1 D10_LED_Row20.1 D10_LED_Row21.1 D10_LED_Row22.1 D10_LED_Row23.1 D10_LED_Row24.1
Col_30_LED_Row1: D10_LED_Row1.4 D10_LED_Row2.4 D10_LED_Row3.4 D10_LED_Row4.4 D10_LED_Row5.4 D10_LED_Row6.4 D10_LED_Row7.4 D10_LED_Row8.4 D10_LED_Row9.4 D10_LED_Row10.4 D10_LED_Row11.4 D10_LED_Row12.4 D10_LED_Row13.4 D10_LED_Row14.4 D10_LED_Row15.4 D10_LED_Row16.4 D10_LED_Row17.4 D10_LED_Row18.4 D10_LED_Row19.4 D10_LED_Row20.4 D10_LED_Row21.4 D10_LED_Row22.4 D10_LED_Row23.4 D10_LED_Row24.4
Col_31_LED_Row1: D11_LED_Row1.2 D11_LED_Row2.2 D11_LED_Row3.2 D11_LED_Row4.2 D11_LED_Row5.2 D11_LED_Row6.2 D11_LED_Row7.2 D11_LED_Row8.2 D11_LED_Row9.2 D11_LED_Row10.2 D11_LED_Row11.2 D11_LED_Row12.2 D11_LED_Row13.2 D11_LED_Row14.2 D11_LED_Row15.2 D11_LED_Row16.2 D11_LED_Row17.2 D11_LED_Row18.2 D11_LED_Row19.2 D11_LED_Row20.2 D11_LED_Row21.2 D11_LED_Row22.2 D11_LED_Row23.2 D11_LED_Row24.2
Col_32_LED_Row1: D11_LED_Row1.1 D11_LED_Row2.1 D11_LED_Row3.1 D11_LED_Row4.1 D11_LED_Row5.1 D11_LED_Row6.1 D11_LED_Row7.1 D11_LED_Row8.1 D11_LED_Row9.1 D11_LED_Row10.1 D11_LED_Row11.1 D11_LED_Row12.1 D11_LED_Row13.1 D11_LED_Row14.1 D11_LED_Row15.1 D11_LED_Row16.1 D11_LED_Row17.1 D11_LED_Row18.1 D11_LED_Row19.1 D11_LED_Row20.1 D11_LED_Row21.1 D11_LED_Row22.1 D11_LED_Row23.1 D11_LED_Row24.1
Col_33_LED_Row1: D11_LED_Row1.4 D11_LED_Row2.4 D11_LED_Row3.4 D11_LED_Row4.4 D11_LED_Row5.4 D11_LED_Row6.4 D11_LED_Row7.4 D11_LED_Row8.4 D11_LED_Row9.4 D11_LED_Row10.4 D11_LED_Row11.4 D11_LED_Row12.4 D11_LED_Row13.4 D11_LED_Row14.4 D11_LED_Row15.4 D11_LED_Row16.4 D11_LED_Row17.4 D11_LED_Row18.4 D11_LED_Row19.4 D11_LED_Row20.4 D11_LED_Row21.4 D11_LED_Row22.4 D11_LED_Row23.4 D11_LED_Row24.4
Col_34_LED_Row1: D12_LED_Row1.2 D12_LED_Row2.2 D12_LED_Row3.2 D12_LED_Row4.2 D12_LED_Row5.2 D12_LED_Row6.2 D12_LED_Row7.2 D12_LED_Row8.2 D12_LED_Row9.2 D12_LED_Row10.2 D12_LED_Row11.2 D12_LED_Row12.2 D12_LED_Row13.2 D12_LED_Row14.2 D12_LED_Row15.2 D12_LED_Row16.2 D12_LED_Row17.2 D12_LED_Row18.2 D12_LED_Row19.2 D12_LED_Row20.2 D12_LED_Row21.2 D12_LED_Row22.2 D12_LED_Row23.2 D12_LED_Row24.2
Col_35_LED_Row1: D12_LED_Row1.1 D12_LED_Row2.1 D12_LED_Row3.1 D12_LED_Row4.1 D12_LED_Row5.1 D12_LED_Row6.1 D12_LED_Row7.1 D12_LED_Row8.1 D12_LED_Row9.1 D12_LED_Row10.1 D12_LED_Row11.1 D12_LED_Row12.1 D12_LED_Row13.1 D12_LED_Row14.1 D12_LED_Row15.1 D12_LED_Row16.1 D12_LED_Row17.1 D12_LED_Row18.1 D12_LED_Row19.1 D12_LED_Row20.1 D12_LED_Row21.1 D12_LED_Row22.1 D12_LED_Row23.1 D12_LED_Row24.1
Col_36_LED_Row1: D12_LED_Row1.4 D12_LED_Row2.4 D12_LED_Row3.4 D12_LED_Row4.4 D12_LED_Row5.4 D12_LED_Row6.4 D12_LED_Row7.4 D12_LED_Row8.4 D12_LED_Row9.4 D12_LED_Row10.4 D12_LED_Row11.4 D12_LED_Row12.4 D12_LED_Row13.4 D12_LED_Row14.4 D12_LED_Row15.4 D12_LED_Row16.4 D12_LED_Row17.4 D12_LED_Row18.4 D12_LED_Row19.4 D12_LED_Row20.4 D12_LED_Row21.4 D12_LED_Row22.4 D12_LED_Row23.4 D12_LED_Row24.4
Col_37_LED_Row1: D13_LED_Row1.2 D13_LED_Row2.2 D13_LED_Row3.2 D13_LED_Row4.2 D13_LED_Row5.2 D13_LED_Row6.2 D13_LED_Row7.2 D13_LED_Row8.2 D13_LED_Row9.2 D13_LED_Row10.2 D13_LED_Row11.2 D13_LED_Row12.2 D13_LED_Row13.2 D13_LED_Row14.2 D13_LED_Row15.2 D13_LED_Row16.2 D13_LED_Row17.2 D13_LED_Row18.2 D13_LED_Row19.2 D13_LED_Row20.2 D13_LED_Row21.2 D13_LED_Row22.2 D13_LED_Row23.2 D13_LED_Row24.2
Col_38_LED_Row1: D13_LED_Row1.1 D13_LED_Row2.1 D13_LED_Row3.1 D13_LED_Row4.1 D13_LED_Row5.1 D13_LED_Row6.1 D13_LED_Row7.1 D13_LED_Row8.1 D13_LED_Row9.1 D13_LED_Row10.1 D13_LED_Row11.1 D13_LED_Row12.1 D13_LED_Row13.1 D13_LED_Row14.1 D13_LED_Row15.1 D13_LED_Row16.1 D13_LED_Row17.1 D13_LED_Row18.1 D13_LED_Row19.1 D13_LED_Row20.1 D13_LED_Row21.1 D13_LED_Row22.1 D13_LED_Row23.1 D13_LED_Row24.1
Col_39_LED_Row1: D13_LED_Row1.4 D13_LED_Row2.4 D13_LED_Row3.4 D13_LED_Row4.4 D13_LED_Row5.4 D13_LED_Row6.4 D13_LED_Row7.4 D13_LED_Row8.4 D13_LED_Row9.4 D13_LED_Row10.4 D13_LED_Row11.4 D13_LED_Row12.4 D13_LED_Row13.4 D13_LED_Row14.4 D13_LED_Row15.4 D13_LED_Row16.4 D13_LED_Row17.4 D13_LED_Row18.4 D13_LED_Row19.4 D13_LED_Row20.4 D13_LED_Row21.4 D13_LED_Row22.4 D13_LED_Row23.4 D13_LED_Row24.4
Col_40_LED_Row1: D14_LED_Row1.2 D14_LED_Row2.2 D14_LED_Row3.2 D14_LED_Row4.2 D14_LED_Row5.2 D14_LED_Row6.2 D14_LED_Row7.2 D14_LED_Row8.2 D14_LED_Row9.2 D14_LED_Row10.2 D14_LED_Row11.2 D14_LED_Row12.2 D14_LED_Row13.2 D14_LED_Row14.2 D14_LED_Row15.2 D14_LED_Row16.2 D14_LED_Row17.2 D14_LED_Row18.2 D14_LED_Row19.2 D14_LED_Row20.2 D14_LED_Row21.2 D14_LED_Row22.2 D14_LED_Row23.2 D14_LED_Row24.2
Col_41_LED_Row1: D14_LED_Row1.1 D14_LED_Row2.1 D14_LED_Row3.1 D14_LED_Row4.1 D14_LED_Row5.1 D14_LED_Row6.1 D14_LED_Row7.1 D14_LED_Row8.1 D14_LED_Row9.1 D14_LED_Row10.1 D14_LED_Row11.1 D14_LED_Row12.1 D14_LED_Row13.1 D14_LED_Row14.1 D14_LED_Row15.1 D14_LED_Row16.1 D14_LED_Row17.1 D14_LED_Row18.1 D14_LED_Row19.1 D14_LED_Row20.1 D14_LED_Row21.1 D14_LED_Row22.1 D14_LED_Row23.1 D14_LED_Row24.1
Col_42_LED_Row1: D14_LED_Row1.4 D14_LED_Row2.4 D14_LED_Row3.4 D14_LED_Row4.4 D14_LED_Row5.4 D14_LED_Row6.4 D14_LED_Row7.4 D14_LED_Row8.4 D14_LED_Row9.4 D14_LED_Row10.4 D14_LED_Row11.4 D14_LED_Row12.4 D14_LED_Row13.4 D14_LED_Row14.4 D14_LED_Row15.4 D14_LED_Row16.4 D14_LED_Row17.4 D14_LED_Row18.4 D14_LED_Row19.4 D14_LED_Row20.4 D14_LED_Row21.4 D14_LED_Row22.4 D14_LED_Row23.4 D14_LED_Row24.4
Col_43_LED_Row1: D15_LED_Row1.2 D15_LED_Row2.2 D15_LED_Row3.2 D15_LED_Row4.2 D15_LED_Row5.2 D15_LED_Row6.2 D15_LED_Row7.2 D15_LED_Row8.2 D15_LED_Row9.2 D15_LED_Row10.2 D15_LED_Row11.2 D15_LED_Row12.2 D15_LED_Row13.2 D15_LED_Row14.2 D15_LED_Row15.2 D15_LED_Row16.2 D15_LED_Row17.2 D15_LED_Row18.2 D15_LED_Row19.2 D15_LED_Row20.2 D15_LED_Row21.2 D15_LED_Row22.2 D15_LED_Row23.2 D15_LED_Row24.2
Col_44_LED_Row1: D15_LED_Row1.1 D15_LED_Row2.1 D15_LED_Row3.1 D15_LED_Row4.1 D15_LED_Row5.1 D15_LED_Row6.1 D15_LED_Row7.1 D15_LED_Row8.1 D15_LED_Row9.1 D15_LED_Row10.1 D15_LED_Row11.1 D15_LED_Row12.1 D15_LED_Row13.1 D15_LED_Row14.1 D15_LED_Row15.1 D15_LED_Row16.1 D15_LED_Row17.1 D15_LED_Row18.1 D15_LED_Row19.1 D15_LED_Row20.1 D15_LED_Row21.1 D15_LED_Row22.1 D15_LED_Row23.1 D15_LED_Row24.1
Col_45_LED_Row1: D15_LED_Row1.4 D15_LED_Row2.4 D15_LED_Row3.4 D15_LED_Row4.4 D15_LED_Row5.4 D15_LED_Row6.4 D15_LED_Row7.4 D15_LED_Row8.4 D15_LED_Row9.4 D15_LED_Row10.4 D15_LED_Row11.4 D15_LED_Row12.4 D15_LED_Row13.4 D15_LED_Row14.4 D15_LED_Row15.4 D15_LED_Row16.4 D15_LED_Row17.4 D15_LED_Row18.4 D15_LED_Row19.4 D15_LED_Row20.4 D15_LED_Row21.4 D15_LED_Row22.4 D15_LED_Row23.4 D15_LED_Row24.4
Col_46_LED_Row1: D16_LED_Row1.2 D16_LED_Row2.2 D16_LED_Row3.2 D16_LED_Row4.2 D16_LED_Row5.2 D16_LED_Row6.2 D16_LED_Row7.2 D16_LED_Row8.2 D16_LED_Row9.2 D16_LED_Row10.2 D16_LED_Row11.2 D16_LED_Row12.2 D16_LED_Row13.2 D16_LED_Row14.2 D16_LED_Row15.2 D16_LED_Row16.2 D16_LED_Row17.2 D16_LED_Row18.2 D16_LED_Row19.2 D16_LED_Row20.2 D16_LED_Row21.2 D16_LED_Row22.2 D16_LED_Row23.2 D16_LED_Row24.2
Col_47_LED_Row1: D16_LED_Row1.1 D16_LED_Row2.1 D16_LED_Row3.1 D16_LED_Row4.1 D16_LED_Row5.1 D16_LED_Row6.1 D16_LED_Row7.1 D16_LED_Row8.1 D16_LED_Row9.1 D16_LED_Row10.1 D16_LED_Row11.1 D16_LED_Row12.1 D16_LED_Row13.1 D16_LED_Row14.1 D16_LED_Row15.1 D16_LED_Row16.1 D16_LED_Row17.1 D16_LED_Row18.1 D16_LED_Row19.1 D16_LED_Row20.1 D16_LED_Row21.1 D16_LED_Row22.1 D16_LED_Row23.1 D16_LED_Row24.1
Col_48_LED_Row1: D16_LED_Row1.4 D16_LED_Row2.4 D16_LED_Row3.4 D16_LED_Row4.4 D16_LED_Row5.4 D16_LED_Row6.4 D16_LED_Row7.4 D16_LED_Row8.4 D16_LED_Row9.4 D16_LED_Row10.4 D16_LED_Row11.4 D16_LED_Row12.4 D16_LED_Row13.4 D16_LED_Row14.4 D16_LED_Row15.4 D16_LED_Row16.4 D16_LED_Row17.4 D16_LED_Row18.4 D16_LED_Row19.4 D16_LED_Row20.4 D16_LED_Row21.4 D16_LED_Row22.4 D16_LED_Row23.4 D16_LED_Row24.4